# Altium PCB Mach dieu khien tu xa.PcbDoc
Units mm, origin at the board's own origin, x right, y up, seen from the top; angles counter-clockwise.
Board outline 143 x 70 mm, 2 copper layers (Top Layer, Bottom Layer); 72 components, 54 nets, 226 pads, 167 vias.
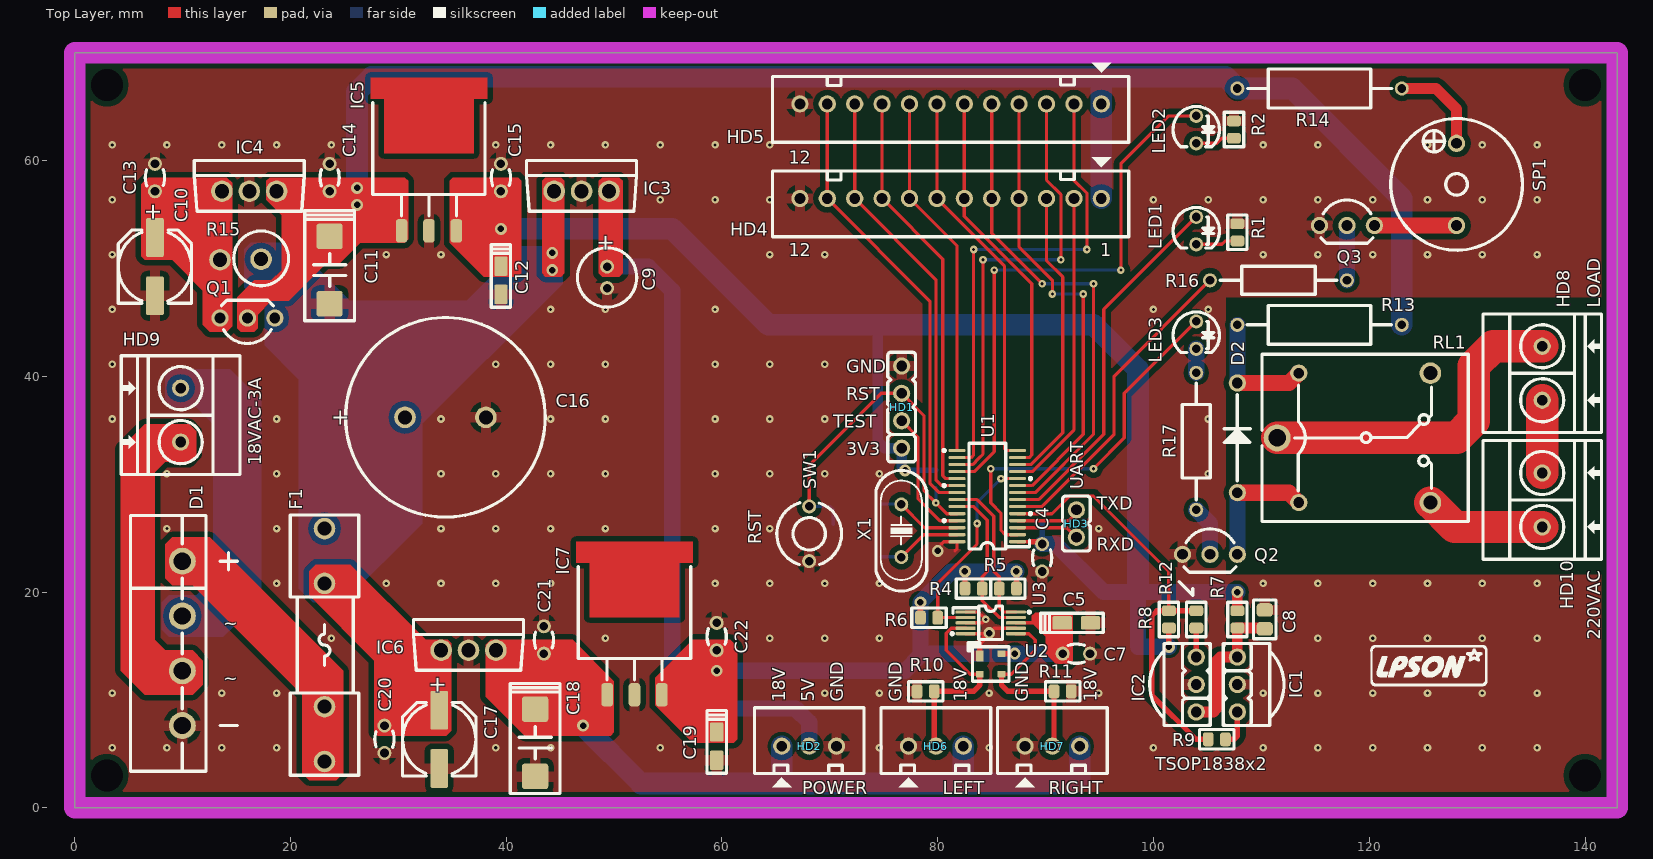
[diagram p0: Top Layer view]
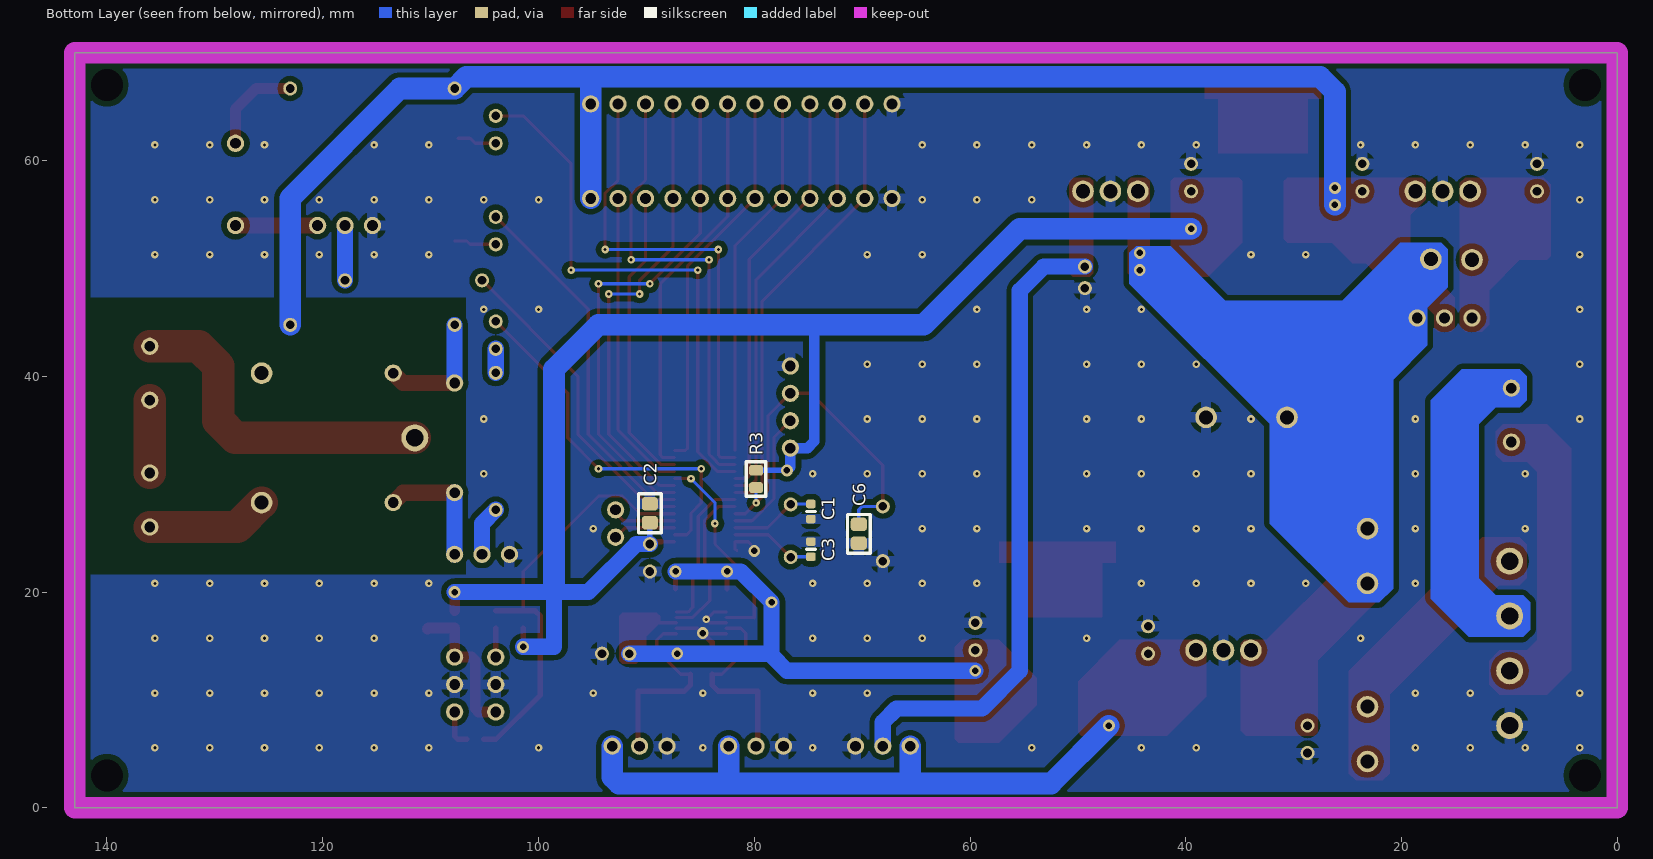
[diagram p1: Bottom Layer view, seen from below]

## Layer stack, top to bottom
Top Solder: solder mask 0.0102, Solder Resist, Dk 3.5
Top Layer: signal copper 0.0356
Dielectric1: dielectric 0.32, FR-4, Dk 4.8
Bottom Layer: signal copper 0.0356
Bottom Solder: solder mask 0.0102, Solder Resist, Dk 3.5

## Board outline
0,0 0,70 143,70 143,0

## Design rules (kind name [scope] priority, off if disabled: settings)
Clearance "Stitching GND" [IsStitchingVia and InNet('GND') vs (IsVia and (Not IsStitchingVia)) Or IsPad] p1: gap=0.5 ignorepadtopadclearanceinfootprint=FALSE
Clearance [All] p2: gap=0.5 ignorepadtopadclearanceinfootprint=FALSE
PlaneConnect [All] p1: planeconnectstyle=Relief reliefexpansion=0.5 reliefentries=4 reliefconductorwidth=0.5 reliefairgap=0.5
PolygonConnect PolygonConnect_1 [isvia] p1: connectstyle=Direct reliefconductorwidth=0.254 reliefentries=4 polygonreliefangle="90 Angle" airgapwidth=0.254
PolygonConnect [All] p2: connectstyle=Relief reliefconductorwidth=1 reliefentries=4 polygonreliefangle="90 Angle" airgapwidth=0.5
RoutingVias [All] p1: holewidth=0.3 width=0.7 viastyle="Through Hole" minholewidth=0.3 minwidth=0.7 maxholewidth=0.6 maxwidth=1.1
SolderMaskExpansion [All] p1: expansion=0.102 istentingtop=FALSE
Width [All] p1: maxlimit=3 minlimit=0.3 preferedwidth=0.5
29 further rules are at their usual default settings.

## Components (designator, comment, footprint, x,y, rotation, side; value= is the part's Value field where it differs from the comment)
C1 "22pF" C0603 74.755,27.464 r90 bottom
C2 "10uF/16V" C0805 89.677,27.305 r90 bottom
C3 "22pF" C0603 74.755,23.971 r270 bottom
C4 "100nF/16V" "Tu gom 104" 89.677,23.178 r90 top
C5 "10uF/16V" CAP_TANTA_10UF_16V 92.852,17.145 r0 top
C6 "1nF" C0805 70.31,25.4 r90 bottom
C7 "100nF/16V" "Tu gom 104" 92.852,14.287 r180 top
C8 "Cap Pol1" C0805 110.315,17.462 r90 top
C9 "10uF/16V" CAP_10UF_16V 49.355,50.165 r270 top
C10 "10uF/50V" C_FC_10UF_50V 7.445,50.165 r270 top
C11 "10uF/35V" CAP_TANTA_10UF_35V 23.637,49.848 r270 top
C12 "10uF/16V" CAP_TANTA_10UF_16V 39.512,48.895 r270 top
C13 "100nF/50V" "Tu gom 104" 7.445,58.42 r270 top
C14 "100nF/25V" "Tu gom 104" 23.637,58.42 r270 top
C15 "100nF/16V" "Tu gom 104" 39.512,58.42 r270 top
C16 "3300uF/50V" CAP_3300UF_50V 30.622,36.195 r0 top
C17 "10uF/50V" C_FC_10UF_50V 33.797,6.35 r270 top
C18 "10uF/35V" CAP_TANTA_10UF_35V 42.687,6.032 r270 top
C19 "10uF/16V" CAP_TANTA_10UF_16V 59.515,5.715 r270 top
C20 "100nF/50V" "Tu gom 104" 28.717,6.35 r90 top
C21 "100nF/25V" "Tu gom 104" 43.498,15.557 r270 top
C22 "100nF/16V" "Tu gom 104" 59.515,15.875 r270 top
D1 "KBU1010" KBU1010G 9.985,15.24 r270 top
D2 "1N4007" 1N4007 107.775,34.29 r90 top
F1 "Fuse/2.5A" FUSE2_5A 23.165,15.085 r90 top
HD1 "SpyBiWire" Header_4 76.66,37.148 r90 top
HD2 "Power" CON3 68.087,5.715 r0 top
HD3 "UART" Header_2 92.852,26.353 r90 top
HD4 "Display Port 1" CON12 81.197,56.487 r180 top
HD5 "Display Port 2" CON12 81.197,65.25 r180 top
HD6 "UM-18 LEFT" CON3 79.835,5.715 r0 top
HD7 "UM-18 RIGHT" CON3 90.63,5.715 r0 top
HD8 "Domino" DOMINO2_GREEN 136.032,37.783 r90 top
HD9 "18VAC-3A" DOMINO2_GREEN 9.83,38.897 r270 top
HD10 "220VAC" DOMINO2_GREEN 136.032,26.035 r90 top
IC1 "TSOP1838" TSOP1838 107.775,11.43 r90 top
IC2 "TSOP1838" TSOP1838 103.965,11.43 r270 top
IC3 "LM7805" LM7805 46.99,57.15 r0 top
IC4 "LM7812" LM7805 16.192,57.15 r0 top
IC5 "LM1086 (3.3V)" LM1086 32.845,53.482 r270 top
IC6 "LM7818" LM7805 36.513,14.605 r0 top
IC7 "LM1086 (3.3V)" LM1086 51.895,10.477 r270 top
LED1 "RED" LED3R 103.965,54.769 r270 top
LED2 "GREEN" LED3R 103.965,64.135 r270 top
LED3 "LED" LED3R 103.965,45.085 r270 top
Q1 "KSA1013" KSA1013 16.017,45.403 r180 top
Q2 "2N2222" 2N2222 105.235,23.495 r0 top
Q3 "2N2222" 2N2222 117.935,53.975 r0 top
R1 "Res2" RESC2012(0805) 107.775,53.34 r270 top
R2 "Res2" RESC2012(0805) 107.457,62.865 r270 top
R3 "Res2" RESC2012(0805) 79.835,30.48 r90 bottom
R4 "Res2" RESC2012(0805) 83.327,20.32 r180 top
R5 "Res2" RESC2012(0805) 86.502,20.32 r0 top
R6 "Res2" RESC2012(0805) 79.2,17.621 r180 top
R7 "Res2" RESC2012(0805) 107.775,17.462 r90 top
R8 "Res2" RESC2012(0805) 101.425,17.462 r270 top
R9 "Res2" RESC2012(0805) 105.87,6.35 r180 top
R10 "Resistor 1/4W" RESC2012(0805) 78.882,10.795 r180 top
R11 "Resistor 1/4W" RESC2012(0805) 91.582,10.795 r0 top
R12 "Res2" RESC2012(0805) 103.965,17.462 r90 top
R13 "Res2" CFR1WS 115.395,44.768 r180 top
R14 "Res2" CFR1WS 115.395,66.675 r0 top
R15 "Res2" R2WD 13.477,50.8 r0 top
R16 "Res2" "RES 1/4W CFR25" 105.235,48.895 r0 top
R17 "Res2" "RES 1/4W CFR25" 103.965,27.623 r90 top
RL1 "Relay 10A/5V" RL_10A_5V 118.57,34.29 r0 top
SP1 "Speaker" SPEAKER 128.095,61.595 r270 top
SW1 "RESET" "BUTTON 2PIN TRON" 68.087,27.94 r270 top
U1 "MSP430G2553" MSP430G2253IPW28R 84.597,28.893 r90 top
U2 "ADS1115" ADS1115 84.915,17.145 r270 top
U3 "PRTR5V0U2X" PRTR5V0U2X 84.915,13.335 r270 top
X1 "12Mhz" CRYSTAL 76.625,25.682 r270 top

## Footprints (in the part's own frame and the unit in brackets; to place one, negate y for a bottom-side part, rotate by r counter-clockwise, add the part's x,y. Pads: shape width x height; smd on the part's side, far side on the other; paste and mask are expansions set on the pad)
1N4007 [mm] "DIODE_DIP"
  round 1.6 hole 1 mask+0.1: 1(-5.08,0) 2(5.08,0)
  silkscreen extent -4,-1.2 4,1.21, body extent -5.8,-1.25 5.8,1.25, height 2.75
2N2222 [mm] "TO-92 Bent Lead, Flat Index; 3 In-Line, Axial Leads; Body Dia. 4.5mm; Leads 0.51 x 0.48 mm (max)"
  round 1.6 hole 1 mask+0.1: 1(-2.54,0) 2(0,0)
  round 1.6 hole 1: 3(2.54,0)
  silkscreen extent -2.41,-1.65 2.41,2.37, body extent -2.79,-1.59 2.79,2.61, height 10
ADS1115 [mm] "MSOP-10, 16-Bit  Analog-to-Digital"
  rrect50% 0.3x1.85 smd mask+0.05: 1(-1,-2.325) 2(-0.5,-2.325) 3(0,-2.325) 4(0.5,-2.325) 5(1,-2.325) 6(1,2.325) 7(0.5,2.325) 8(0,2.325) 9(-0.5,2.325) 10(-1,2.325)
  silkscreen extent -1.55,-3.67 1.55,3.68, body extent -1.5,-2.45 1.5,2.45, height 1.15
"BUTTON 2PIN TRON" [mm] "PIN TO PIN 5.08, W=6MM"
  round 1.3 hole 0.8: 1(0,0) 2(5.08,0)
  silkscreen extent -0.33,-3 5.4,3
C0603 [mm] "Chip Capacitor, Body 1.6x0.8mm, 1608"
  rrect50% 0.8x0.9 smd: 1(-0.7,0) 2(0.7,0)
  silkscreen extent 0,-0.4 0,0.4, body extent -0.8,-0.4 0.8,0.4, height 0.6
C0805 [mm] "Chip Capacitor, 2-Leads, Body 2.0x1.3mm, IPC Medium Density"
  rrect50% 1.25x1.5 smd: 1(-0.875,0) 2(0.875,0)
  silkscreen extent -1.8,-1.05 1.8,1.05, body extent -1,-0.6 1,0.6, height 0.95
C_FC_10UF_50V [mm] "ALUMINUM CAPACITOR 6.8x6.8x5.5mm"
  rrect20% 3.6x1.65 smd mask+0.1: 1(-2.7,0) 2(2.7,0)
  silkscreen extent -3.4,-3.4 3.4,3.4, body extent -3.65,-3.3 3.65,3.3, height 7.7
CAP_10UF_16V [mm] "Capacitor, Electrolytic, Radial; Body 5 x 11 mm (Dia.xH typ); Pin Spacing 2 mm (typ)"
  round 1.3 hole 0.8: 1(0,0) 2(2,0)
  silkscreen extent -1.75,-2.75 3.75,2.75, body extent -1.53,-2.53 3.53,2.53, height 11.53
CAP_3300UF_50V [mm] "Capacitor, Electrolytic, Radial; Body 18 x 35.5 mm (Dia.xH typ); Pin Spacing 7.5 mm (typ)"
  round 2 hole 1.3: 1(0,0) 2(7.5,0)
  silkscreen extent -5.5,-9.25 13,9.25
CAP_TANTA_10UF_16V [mm] "CAP TANTALUM 10UF 16V 10% C1206(3216), Body 3.2x1.6mm"
  rrect20% 1.8x1.23 smd: 1(-1.31,0) 2(1.31,0)
  silkscreen extent -3.3,-0.9 2.5,0.9, body extent -1.6,-0.8 1.6,0.8, height 1
CAP_TANTA_10UF_35V [mm] "CAP TANTALUM 10UF 35V 10% C2917(7343), Body 7.3x4.3mm"
  rrect20% 2.37x2.43 smd: 1(-3.12,0) 2(3.12,0)
  silkscreen extent -5.5,-2.3 4.7,2.3, body extent -3.8,-2.3 3.8,2.3, height 3.1
CFR1WS [mm] "RESISTOR_1W"
  round 1.3 hole 0.8: 1(-7.62,0) 2(7.62,0)
  silkscreen extent -6.68,-1.8 6.7,1.8
CON3 [mm] "CON 3"
  round 1.6 hole 1 mask+0.1: 1(-2.54,0) 2(0,0) 3(2.54,0)
  silkscreen extent -5.08,-3.8 5.08,3.56, body extent -5,-2.29 5,3.41, height 7
CON12 [mm] "CON12"
  round 1.6 hole 1 mask+0.1: 1(-13.97,0) 2(-11.43,0) 3(-8.89,0) 4(-6.35,0) 5(-3.81,0) 6(-1.27,0) 7(1.27,0) 8(3.81,0) 9(6.35,0) 10(8.89,0) 11(11.43,0) 12(13.97,0)
  silkscreen extent -16.51,-3.8 16.51,3.56, body extent -16.3,-2.29 16.3,3.41, height 7
CRYSTAL [mm] "Quartz Crystal, Thru-Hole; 2 Leads; Body 11.35 x 4.65 x 13.46 mm (LxWxH max)"
  round 1.3 hole 0.8 mask+0.1: 1(-2.44,0) 2(2.44,0)
  silkscreen extent -5.59,-2.35 5.59,2.35, body extent -5.49,-2.25 5.49,2.25, height 3.6
DOMINO2_GREEN [mm] "10A PIN TO PIN 5mm 11mmx11mm"
  round 1.6 hole 1 mask+0.1: 1(0,0) 2(5,0)
  silkscreen extent -3,-5.5 8,5.5, body extent -3.14,-4.05 7.62,4.95, height 12.5
FUSE2_5A [mm] "Fuse 2.5A  250V"
  round 2 hole 1.3: 1(-10.795,0) 1(-5.715,0) 2(5.715,0) 2(10.795,0)
  silkscreen extent -12.06,-3.18 12.06,3.18, body extent -11.3,-3.09 11.4,3.1, height 9.6
Header_2 [mm] "Connector DIP, 2Pin_2.54mm"
  round 1.6 hole 1 mask+0.1: 1(-1.27,0) 2(1.27,0)
  silkscreen extent -2.54,-1.28 2.54,1.28, body extent -2.54,-1.27 2.54,1.27, height 10.1
Header_4 [mm] "Connector DIP, 4Pin_2.54mm"
  round 1.6 hole 1 mask+0.1: 1(-3.81,0) 2(-1.27,0) 3(1.27,0) 4(3.81,0)
  silkscreen extent -5.08,-1.28 5.08,1.28, body extent -5.08,-1.27 5.08,1.27, height 10.1
KBU1010G [mm] "KBP206 bridge diode 10A"
  round 2.5 hole 1.6 mask+0.1: 1(-7.62,0) 2(-2.54,0) 3(2.54,0) 4(7.62,0)
  silkscreen extent -11.85,-4.8 11.85,2.2, body extent -11.6,-4.75 11.6,2.2, height 18.65
KSA1013 [mm] "TO-92 Bent Lead, Flat Index; 3 In-Line, Axial Leads; Body Dia. 4.5mm; Leads 0.51 x 0.48 mm (max)"
  round 1.6 hole 1 mask+0.1: 1(-2.54,0) 2(0,0)
  round 1.6 hole 1: 3(2.54,0)
  silkscreen extent -2.41,-1.65 2.41,2.37, body extent -2.79,-1.59 2.79,2.61, height 10
LED3R [mm] "LED 3mm_RED"
  round 1.3 hole 0.8: 1(0,0) 2(2.54,0)
  silkscreen extent -0.88,-2.15 2.87,2.15, body extent -0.73,-2 2.94,2, height 4.6
LM1086 [mm] "TO-263 1.5A Low Dropout Positive Regulators"
  rrect50% 2.16x1.07 smd mask+0.1: 1(0,-2.54) 2(0,0) 3(0,2.54)
  Top Layer region: -14.17,-5.4 -14.17,5.4 -12.26,5.4 -12.26,4.165 -7.18,4.165 -7.18,-4.165 -12.26,-4.165 -12.26,-5.4
  silkscreen extent -11.88,-5.21 -1.4,5.21, body extent -14.52,-5 1.15,5, height 4.78
LM7805 [mm] "POWER IC 7805"
  round 2 hole 1.3: 1(-2.54,0) 2(0,0) 3(2.54,0)
  silkscreen extent -5.1,-1.85 5.1,2.85, body extent -5.56,-1.63 5.65,3.06, height 19.17
MSP430G2253IPW28R [mm] "TSSOP PW 28  PIN TO PIN 0.65"
  oval 0.3x1.6 smd mask+0.1: 1(-4.225,-2.8) 2(-3.575,-2.8) 3(-2.925,-2.8) 4(-2.275,-2.8) 5(-1.625,-2.8) 6(-0.975,-2.8) 7(-0.325,-2.8) 8(0.325,-2.8) 9(0.975,-2.8) 10(1.625,-2.8) 11(2.275,-2.8) 12(2.925,-2.8) 13(3.575,-2.8) 14(4.225,-2.8) 15(4.225,2.8) 16(3.575,2.8) 17(2.925,2.8) 18(2.275,2.8) 19(1.625,2.8) 20(0.975,2.8) 21(0.325,2.8) 22(-0.325,2.8) 23(-0.975,2.8) 24(-1.625,2.8) 25(-2.275,2.8) 26(-2.925,2.8) 27(-3.575,2.8) 28(-4.225,2.8)
  silkscreen extent -4.9,-4.1 4.9,4.1, body extent -4.9,-3.31 4.9,3.31, height 1.2
PRTR5V0U2X [mm] "SOT143B Ultra low capacitance double rail-to-rail ESD protection diode"
  rrect10% 1x0.7 smd mask+0.1: 1(-0.75,-1)
  rrect10% 0.6x0.7 smd mask+0.1: 2(0.95,-1) 3(0.95,1) 4(-0.95,1)
  silkscreen extent -2,-2.1 1.6,1.7
R2WD [mm] "R2W, 2 pin 3.81mm stand"
  round 2 hole 1.3: 1(0,0) 2(3.81,0.051)
  silkscreen extent 1.27,-2.41 6.35,2.66
"RES 1/4W CFR25" [mm] "Axial Device, Thru-Hole; 2 Leads fi 0.55"
  round 1.3 hole 0.8 mask+0.1: 1(0,0) 2(12.7,0)
  silkscreen extent 0.94,-1.3 11.76,1.3, body extent 0.97,-1.16 11.74,1.16, height 2.93
RESC2012(0805) [mm] "Chip Resistor, Body 2.0x1.3mm, 1/8W 0805"
  rrect50% 1x1.3 smd: 1(-0.8,0) 2(0.8,0)
  silkscreen extent -1.6,-0.9 1.6,0.9, body extent -1,-0.62 1,0.63, height 0.6
RL_10A_5V [mm] "Relay SRD-05VDC-SL-C, 5 pin, 10A,19.1X15.5"
  round 2.5 hole 1.6: 1(-7.1,0)
  round 2 hole 1.3: 2(7.1,6) 3(7.1,-6)
  round 1.6 hole 1: 4(-5.1,-6) 5(-5.1,6)
  silkscreen extent -8.5,-7.75 10.6,7.75, body extent -8.5,-7.75 10.6,7.75, height 15.3
SPEAKER [mm] "TMB12A05"
  round 1.6 hole 1 mask+0.1: 1(0,0) 2(7.62,0)
  silkscreen extent -2.29,-6.1 9.91,6.1
TSOP1838 [mm] "Connector DIP, 3Pin_2.54mm"
  round 1.6 hole 1 mask+0.1: 1(2.54,0) 2(0,0) 3(-2.54,0)
  silkscreen extent -3.81,-4.32 3.81,1.3
"Tu gom 104" [mm] "Capacitor, Radial, Tantalum, Non-Polarised; Body 3.05 x 1.78 x 3.43 mm (WxTxH max); Pin Spacing 2.54 mm (typ)"
  round 1.3 hole 0.8: 1(-1.27,0) 2(1.27,0)
  silkscreen extent -0.73,-0.89 0.76,0.89, body extent -2.92,-0.85 2.92,0.85, height 6.42

## Part data
C1 C3: library part CN1, "0805-SMD Capacitor"
C2 C16: library part CP1, "Cap P  0,1uF < 22uF , 16 - 50V"
C4 C6 C7 C13 C14 C15 C20 C21 C22: library part CN2, "Cap np 104 => 105pF"
C5 C11 C12 C18 C19: library part CP1, "Tantalum Capacitor"
C8: "Polarized Capacitor (Radial)"
C9 C10 C17: library part CP1, "Aluminium Capacitor"
D1: "10A glass passivated bridge rectifier"
D2: library part D1A, "Diode 1A"
F1: library part Fuse, "Fuse"
HD1: library part Hed4, "Header 4 (Green)"
HD2 HD6 HD7: library part Hed3, "Header 3 (Green)"
HD3 HD8 HD9 HD10: library part Hed2, "Header 2 (Green)"
HD4 HD5: library part Hed12, "Header 12"
IC3 IC4 IC5 IC6 IC7: library part LM78xx, "Linear Regulator"
LED1 LED2: library part LED, "LED Single colour Green and Red"
LED3: "LED Single colour Green and Red"
Q1: library part A1015, "PNP 600mW, ECB"
Q2 Q3: library part C1815, "TRANS GP SS NPN LP 40V TO92"
R1 R2 R3 R4 R5 R6 R7 R8 R9 R12 R13 R14 R15 R16 R17: "Resistor"
R10 R11: library part Res2
RL1: library part "Relay 1", "Relay SPDT,10A - 12VDC 5 Pin"
SP1: library part SPK, "Speaker Chip"
SW1: library part SW2, "Switch button 2 pin"
U1: "MSP430G2553 (28 pins)"
U2: "Analog to Digital Converter"
U3: "ESD protection diode"
X1: library part XT2, "Crystal For all Crystal 2pin."

## Free pads (board coordinates)
  round 0 hole 3 mask+2.5: hole1(140,3) hole2(140,67) hole3(3,67) hole4(3,3)

## Via types
v1: diameter 0.7, hole 0.3, Top Layer to Bottom Layer, tented both sides, 151 vias
v2: diameter 1.1, hole 0.6, Top Layer to Bottom Layer, 16 vias

## Nets (pads, with @x,y where several pads share a name; then routed paths per layer and width w, separated by ;. In a path a pad name is that pad's centre, name@x,y a point inside that pad or via, vN(x,y) a via of type N, cw(c..) or ccw(c..) an arc to the next point about the centre after c; other vN are vias at no path point)
3.3VA: C5.1 C7.2 C19.1 C22.2 IC7.3 R4.2 R5.2 R6.2 U2.8 U3.4 | length 57
  Top Layer w0.3: U2.8 C5.1@90.953,17.145
  Top Layer w0.5: R6.2 v2(78.4,19.05) ; R4.2 v2(82.527,21.907) ; U3.4 v2@87.135,14.285 ; R5.2 v2(87.303,21.907)
  Bottom Layer w1.5: v2(59.515,12.7) 76.977,12.7 78.4,14.122 v2(78.4,19.05) 81.257,21.907 v2(82.527,21.907) v2(87.303,21.907) ; 78.565,14.287 v2(87.137,14.287) C7.2
3V3: C2.1 C4.2 C12.1 C15.2 HD1.1 IC5.3 R3.2 R7.2 R8.2 U1.1 | length 139.1
  Top Layer w0.3: U1.1 88.627,24.667
  Top Layer w0.5: 88.627,24.667 89.457,24.667 C4.2 ; v2(101.425,14.922) R8.2
  Top Layer w1: R7.2 v2(107.775,20.002)
  Bottom Layer w0.5: v2(76.977,31.28) R3.2 ; C4.2 C2.1
  Bottom Layer w1: 74.437,44.768 74.437,33.973 75.072,33.338 HD1.1 76.66,31.598 v2(76.977,31.28)
  Bottom Layer w1.5: C4.2 90.947,24.448 90.947,24.436 95.381,20.002 98.567,20.002 ; v2(101.425,14.922) 98.567,14.922 98.567,20.002 ; v2(107.775,20.002) 98.567,20.002
  Bottom Layer w2: v2(39.512,53.657) 55.387,53.657 64.277,44.768 74.437,44.768 94.44,44.768 98.567,40.64 98.567,20.002
5V: C9.1 HD2.2 IC3.3 | length 59.1
  Bottom Layer w1.5: C9.1 53.165,50.165 55.387,47.943 55.387,12.7 58.88,9.207 66.817,9.207 68.087,7.938 HD2.2
12V: C11.1 C14.2 HD4.1 HD5.1 IC4.3 IC5.1 Q1.2 R13.1 R14.1 | length 135.5
  Bottom Layer w2: v2(26.177,55.88) 26.177,66.358 27.566,67.746 95.167,67.746 ; HD4.1 HD5.1 95.167,67.746 ; R13.1 123.015,56.515 112.855,66.675 R14.1 106.704,67.746 95.167,67.746
  other v2: 26.177,57.468
18V: C18.1 C21.2 HD2.1 HD6.3 HD7.3 IC6.3 IC7.1 | length 58.3
  Bottom Layer w2: v2(47.132,7.62) 52.498,2.254 65.547,2.254 ; HD2.1 65.547,2.254 ; HD6.3 82.375,2.254 ; HD7.3 93.17,2.857 92.567,2.254 82.375,2.254 ; 65.547,2.254 82.375,2.254
26VDC: C16.1 C17.1 C20.2 F1.2 IC3.1 IC6.1 Q1.1 R15.2
  other v2: 44.275,49.848 44.275,51.435
AIN0: HD6.2 R10.1 U2.4 U3.2 | length 18.2
  Top Layer w0.3: U2.4 81.24,16.645 80.787,16.192 80.787,14.605 83.007,12.385 U3.2
  Top Layer w0.5: HD6.2 79.682,5.868 R10.1 83.327,10.795 83.915,11.382 U3.2
AIN2: HD7.2 R11.1 U2.6 U3.3 | length 18.3
  Top Layer w0.3: U3.3 86.822,12.385 89.042,14.605 89.042,15.557 88.455,16.145 U2.6
  Top Layer w0.5: U3.3 85.915,11.382 86.502,10.795 R11.1 90.783,5.868 HD7.2
ALERT: R6.1 U1.10 U2.2 | length 19.5
  Top Layer w0.3: U2.2 80.024,17.645 R6.1 80,20.802 83.645,24.448 v1(83.645,26.353) ; v1(85.867,30.518) U1.10
  Bottom Layer w0.3: v1(83.645,26.353) 83.645,28.295 v1(85.867,30.518)
BUZZ: R16.1 U1.6 | length 29.7
  Top Layer w0.3: U1.6 89.655,27.918 96.345,34.608 96.345,40.005 R16.1
GND: C1.1 C2.2 C3.1 C4.1 C5.2 C6.1 C7.1 C8.2 C9.2 C10.2 C11.2 C12.2 C13.1 C14.1 C15.1 C16.2 C17.2 C18.2 C19.2 C20.1 C21.1 C22.1 D1.4 HD1.4 HD2.3 HD4.12 HD5.12 HD6.1 HD7.1 IC1.2 IC2.2 IC3.2 IC4.2 IC5.2 IC6.2 IC7.2 Q2.1 Q3.1 R1.1 R2.1 R10.2 R11.2 SW1.2 U1.28 U2.1 U2.3 U2.5 U2.7 U3.1 | length 13.9
  Top Layer w0.3: 80.328,24.448 80.547,24.667 U1.28 81.797,24.012 81.597,23.813 ; U2.5 84.725,16.145 v2(84.772,16.192) 85.225,16.645 U2.7 ; U2.3 84.138,17.145 v1(84.455,17.462) 83.772,18.145 U2.1
  Top Layer w0.5: U3.1 83.915,15.335 v2@84.725,16.145
  other v1: 3.48,5.56 8.56,5.56 13.64,5.56 18.72,5.56 39.04,5.56 44.12,5.56 54.28,5.56 74.6,5.56 84.76,5.56 100,5.56 110.16,5.56 115.24,5.56 120.32,5.56 125.4,5.56 130.48,5.56 135.56,5.56 3.48,10.64 13.64,10.64 18.72,10.64 69.52,10.64 74.6,10.64 84.76,10.64 94.92,10.64 110.16,10.64 115.24,10.64 120.32,10.64 125.4,10.64 130.48,10.64 135.56,10.64 23.8,15.72 49.2,15.72 64.44,15.72 69.52,15.72 74.6,15.72 115.24,15.72 120.32,15.72 125.4,15.72 130.48,15.72 135.56,15.72 18.72,20.8 28.88,20.8 33.96,20.8 39.04,20.8 44.12,20.8 59.36,20.8 64.44,20.8 69.52,20.8 74.6,20.8 110.16,20.8 115.24,20.8 120.32,20.8 125.4,20.8 130.48,20.8 135.56,20.8 8.56,25.88 18.72,25.88 33.96,25.88 39.04,25.88 44.12,25.88 49.2,25.88 59.36,25.88 64.44,25.88 94.92,25.88 8.56,30.96 18.72,30.96 33.96,30.96 39.04,30.96 44.12,30.96 49.2,30.96 59.36,30.96 64.44,30.96 69.52,30.96 74.6,30.96 105.08,30.96 3.48,36.04 18.72,36.04 33.96,36.04 44.12,36.04 49.2,36.04 59.36,36.04 64.44,36.04 69.52,36.04 105.08,36.04 3.48,41.12 39.04,41.12 44.12,41.12 49.2,41.12 59.36,41.12 64.44,41.12 69.52,41.12 3.48,46.2 44.12,46.2 49.2,46.2 59.36,46.2 100,46.2 105.08,46.2 3.48,51.28 28.88,51.28 33.96,51.28 64.44,51.28 69.52,51.28 110.16,51.28 115.24,51.28 120.32,51.28 125.4,51.28 130.48,51.28 135.56,51.28 3.48,56.36 54.28,56.36 59.36,56.36 64.44,56.36 100,56.36 105.08,56.36 110.16,56.36 115.24,56.36 120.32,56.36 125.4,56.36 130.48,56.36 135.56,56.36 3.48,61.44 8.56,61.44 13.64,61.44 18.72,61.44 23.8,61.44 39.04,61.44 44.12,61.44 49.2,61.44 54.28,61.44 59.36,61.44 64.44,61.44 110.16,61.44 115.24,61.44 125.4,61.44 130.48,61.44 135.56,61.44
  other v2: 80.01,23.813
IREMOTE: R8.1 R9.2 R12.2 U1.5 | length 39.8
  Top Layer w0.3: U1.5 90.592,27.267 92.217,28.893 94.44,28.893 101.425,21.907 R8.1
  Top Layer w0.5: R12.2 R8.1 100.32,18.262 99.837,17.78 99.837,10.477 103.965,6.35 R9.2
LEDA1: HD4.2 U1.11 | length 28.3
  Top Layer w0.3: U1.11 88.777,31.167 92.627,35.017 HD4.2
LEDA2: HD4.3 U1.12 | length 27.8
  Top Layer w0.3: U1.12 88.644,31.818 91.582,34.756 91.582,49.213 90.087,50.708 HD4.3
LEDB1: HD5.2 U1.16 | length 45.2
  Top Layer w0.3: U1.16 83.092,32.467 83.327,32.703 v1(83.327,51.753) ; HD5.2 92.627,58.19 93.831,56.986 v1(93.831,51.753)
  Bottom Layer w0.3: v1(83.327,51.753) v1(93.831,51.753)
LEDB2: HD5.3 U1.17 | length 43
  Top Layer w0.3: U1.17 83.235,31.818 83.802,32.385 83.802,32.394 84.199,32.791 v1(84.199,50.8) ; HD5.3 90.087,58.19 91.422,56.854 v1(91.422,50.8)
  Bottom Layer w0.3: v1(84.199,50.8) v1(91.422,50.8)
NetC8_1: C8.1 IC1.1 IC2.1 R7.1 | length 13.8
  Top Layer w1: IC2.1 105.552,8.89 105.87,9.207 105.87,13.652 106.187,13.97 IC1.1 R7.1 110.24,16.663 C8.1
NetC10_1: C10.1 C13.2 IC4.1 Q1.3 R15.1
NetD1_1: D1.1 F1.1
NetD1_2: D1.2 HD9.1
NetD1_3: D1.3 HD9.2
NetD2_1: D2.1 Q2.3 RL1.4 | length 11.8
  Top Layer w1.5: D2.1 112.55,29.21 RL1.4
  Bottom Layer w1.5: Q2.3 D2.1
NetD2_2: D2.2 R13.2 RL1.5 | length 11.5
  Top Layer w1.5: D2.2 112.55,39.37 RL1.5
  Bottom Layer w1.5: D2.2 R13.2
NetHD8_1: HD8.1 HD10.2 | length 6.7
  Top Layer w3: HD10.2 HD8.1
NetHD8_2: HD8.2 RL1.1 | length 31.1
  Top Layer w3: RL1.1 128.095,34.29 129.682,35.878 129.682,40.958 131.507,42.783 HD8.2
NetHD10_1: HD10.1 RL1.3 | length 11.3
  Top Layer w3: RL1.3 127.925,26.035 HD10.1
NetIC1_3: IC1.3 R9.1 | length 3.5
  Top Layer w0.5: R9.1 107.457,6.35 107.775,6.667 IC1.3
NetIC2_3: IC2.3 R12.1 | length 2.7
  Top Layer w0.5: IC2.3 R12.1
NetLED1_2: LED1.2 R1.2 | length 3.9
  Top Layer w0.3: LED1.2 106.346,52.229 106.657,52.54 R1.2
NetLED2_2: LED2.2 R2.2 | length 3.7
  Top Layer w0.3: LED2.2 105.87,61.595 106.34,62.065 R2.2
NetLED3_2: LED3.2 R17.2 | length 2.2
  Bottom Layer w1.5: R17.2 LED3.2
NetQ2_2: Q2.2 R17.1 | length 4.7
  Bottom Layer w1.5: R17.1 105.235,26.353 Q2.2
NetQ3_2: Q3.2 R16.2 | length 5.1
  Bottom Layer w1.5: R16.2 Q3.2
NetQ3_3: Q3.3 SP1.2 | length 7.6
  Top Layer w1.5: Q3.3 SP1.2
NetR4_1: R4.1 U1.23 U2.9 | length 14.7
  Top Layer w0.3: U1.23 83.35,27.918 84.597,26.67 84.597,21.907 84.127,21.437 R4.1 84.127,19.203 85.685,17.645 U2.9
NetR5_1: R5.1 U1.22 U2.10 | length 14.4
  Top Layer w0.3: U1.22 83.652,28.567 85.197,27.023 85.197,21.943 85.703,21.437 R5.1 85.703,18.58 86.137,18.145 U2.10
NetR14_2: R14.2 SP1.1 | length 9
  Top Layer w1: R14.2 126.19,66.675 128.095,64.77 SP1.1
P1.5: LED1.1 U1.7 | length 34.2
  Top Layer w0.3: U1.7 89.352,28.567 95.392,34.608 95.392,46.196 LED1.1
P2.5: LED2.1 U1.18 | length 51.4
  Top Layer w0.3: U1.18 83.38,31.167 85.232,33.02 v1(85.232,49.848) ; v1(96.98,49.848) 96.98,59.69 101.425,64.135 LED2.1
  Bottom Layer w0.3: v1(85.232,49.848) v1(96.98,49.848)
RELAY: LED3.1 U1.2 | length 34.9
  Top Layer w0.3: v1(84.915,31.433) 84.915,28.258 85.867,27.305 85.867,25.718 86.267,25.318 U1.2 ; v1(94.44,31.433) 97.297,34.29 97.297,38.418 LED3.1
  Bottom Layer w0.3: v1(84.915,31.433) v1(94.44,31.433)
RESET: C6.2 HD1.3 R3.1 SW1.1 U1.24 | length 34.1
  Top Layer w0.3: SW1.1 68.087,31.75 74.755,38.418 HD1.3 78.727,36.35 78.727,29.365 v1(79.835,28.258) 80.825,27.267 U1.24
  Bottom Layer w0.3: SW1.1 69.992,27.94 70.31,27.623 C6.2 ; v1(79.835,28.258) R3.1
RXD: HD3.1 U1.3 | length 5.8
  Top Layer w0.3: U1.3 91.967,25.967 HD3.1
SEG_A: HD4.4 HD5.4 U1.9 | length 42.8
  Top Layer w0.3: U1.9 88.747,29.867 93.487,34.608 v1(93.487,47.625) ; HD5.4 HD4.4 87.547,51.978 90.63,48.895 v1(90.63,47.625)
  Bottom Layer w0.3: v1(90.63,47.625) v1(93.487,47.625)
SEG_B: HD4.5 HD5.5 U1.8 | length 46.6
  Top Layer w0.3: HD5.5 HD4.5 85.007,53.248 v1(89.677,48.578) ; U1.8 89.05,29.218 94.44,34.608 v1(94.44,48.578)
  Bottom Layer w0.3: v1(89.677,48.578) v1(94.44,48.578)
SEG_C: HD4.6 HD5.6 U1.13 | length 36.6
  Top Layer w0.3: HD5.6 HD4.6 82.467,54.836 88.725,48.578 88.725,32.703 88.49,32.467 U1.13
SEG_D: HD4.7 HD5.7 U1.14 | length 35.8
  Top Layer w0.3: HD5.7 HD4.7 86.185,50.229 86.185,33.338 86.405,33.118 U1.14
SEG_E: HD4.8 HD5.8 U1.15 | length 34
  Top Layer w0.3: HD5.8 HD4.8 81.797,52.076 U1.15
SEG_F: HD4.9 HD5.9 U1.19 | length 38.2
  Top Layer w0.3: HD5.9 HD4.9 80.47,50.864 80.47,30.798 80.75,30.518 U1.19
SEG_G: HD4.10 HD5.10 U1.20 | length 40.2
  Top Layer w0.3: HD5.10 HD4.10 79.835,48.959 79.835,30.399 80.366,29.867 U1.20
SEG_H: HD4.11 HD5.11 U1.21 | length 42
  Top Layer w0.3: HD5.11 HD4.11 79.281,46.972 79.281,30.081 80.145,29.218 U1.21
TEST: HD1.2 U1.25 | length 12.3
  Top Layer w0.3: HD1.2 78.173,34.364 78.173,28.649 80.205,26.618 U1.25
TXD: HD3.2 U1.4 | length 6.1
  Top Layer w0.3: U1.4 92.165,26.618 92.852,27.305 HD3.2
XIN: C3.2 U1.27 X1.2 | length 7.9
  Top Layer w0.3: X1.2 78.7,25.318 U1.27
  Bottom Layer w0.3: C3.2 76.595,23.271 X1.2
XOUT: C1.2 U1.26 X1.1 | length 8
  Top Layer w0.3: X1.1 78.779,25.967 U1.26
  Bottom Layer w0.3: C1.2 76.583,28.164 X1.1
pads on no net: RL1.2

## Polygon pours and split planes (outlines as drawn)
GND on Top Layer "Bottom Layer-No Net" (solid, remove dead copper, pour order 4): 0,70 0,0 143,0 142.558,0 142.558,70 0,70
GND on Bottom Layer "Bottom Layer-No Net" (solid, remove dead copper, pour order 6): 0,70 0,0 143,0 143,70 0,70

## Keep-outs
Keep-Out Layer:
  the board outline again, w2

## Other copper
Top Layer:
  region net 3.3VA: 88.725,17.78 89.042,18.098 92.217,18.098 92.535,17.78 92.535,13.652 92.217,13.335 90.947,13.335 89.995,14.287 89.995,15.875 88.725,17.145
  region net 5V: 48.578,58.102 48.895,58.42 50.483,58.42 50.8,58.102 50.8,49.53 50.483,49.213 48.895,49.213 48.578,49.53
  region net 3V3: 34.75,52.387 37.925,49.213 41.1,49.213 41.417,49.53 41.417,58.102 41.1,58.42 35.067,58.42 34.75,58.102
  region net 12V: 15.065,44.45 15.382,44.133 16.652,44.133 16.97,44.45 16.97,45.72 18.24,46.99 19.827,46.99 23.32,50.483 24.59,50.483 24.59,54.927 19.192,54.927 19.192,49.848 18.24,48.895 16.652,48.895 15.065,47.308
  region net 12V: 23.002,50.483 24.59,50.483 26.495,52.387 30.622,52.387 30.94,52.705 30.94,58.102 30.622,58.42 18.098,58.42 17.78,58.102 17.78,56.34 22.685,51.435 22.685,50.8
  region net NetC10_1: 12.525,44.133 14.112,44.133 14.605,44.625 14.605,57.927 14.112,58.42 6.81,58.42 6.175,57.785 6.175,51.118 6.492,50.8 9.032,50.8 11.89,47.943 11.89,44.768
  region net 3.3VA: 53.8,12.065 57.292,15.557 60.785,15.557 61.42,14.922 61.42,6.35 61.102,6.032 57.292,6.032 53.8,9.525
  region net 18V: 38.1,15.098 38.56,15.557 46.18,15.557 49.99,11.747 49.99,6.985 49.672,6.667 41.735,6.667 38.1,10.302
  region net 26VDC: 25.542,22.543 32.527,15.557 34.608,15.557 34.925,15.24 34.925,7.16 34.432,6.667 28.082,6.667 27.765,6.985 27.765,13.652 21.732,19.685 21.732,21.907 22.367,22.543
  region net NetD1_1: 8.397,24.448 8.397,21.273 9.032,20.637 10.937,20.637 21.097,10.477 21.097,3.175 21.732,2.54 24.272,2.54 24.907,3.175 24.907,12.7 12.525,25.083 9.032,25.083
  region net NetD1_3: 11.255,32.703 11.255,34.925 10.62,35.56 6.492,35.56 4.27,33.338 4.27,12.7 6.492,10.477 10.937,10.477 11.89,11.43 11.89,13.652 10.937,14.605 8.397,14.605 7.445,15.557 7.445,31.115 8.397,32.068 10.62,32.068
  region net 26VDC: 43.322,58.102 43.64,58.42 45.085,58.42 45.403,58.102 45.403,49.53 45.085,49.213 43.64,49.213 43.322,49.53
Bottom Layer:
  region net 26VDC: 24.907,19.05 32.21,26.353 32.21,40.323 20.145,52.387 16.335,52.387 15.7,51.753 15.7,48.26 17.605,46.355 17.605,42.863 20.78,39.688 20.78,20.32 22.05,19.05
  region net NetD1_2: 8.397,37.783 8.397,40.005 9.032,40.64 14.43,40.64 17.287,37.783 17.287,19.367 13.795,15.875 8.715,15.875 8.08,16.51 8.08,19.05 8.715,19.685 11.255,19.685 12.842,21.273 12.842,35.56 11.255,37.148 9.032,37.148
  region net 26VDC: 45.227,51.435 44.592,52.07 41.417,52.07 36.337,46.99 25.225,46.99 25.225,34.608 31.257,34.608 45.227,48.578

## Silkscreen, mask and mechanical layers (free items; w line width, h text height)
Top Overlay:
  drawing of 897 lines, arcs and shapes, not listed
  text "12" at 66.182,59.69 h1.2
  text "12" at 66.182,51.118 h1.2
  text "1" at 95.075,51.118 h1.2
  text "LOAD" at 141.43,46.355 h1.2 r90
  text "GND" at 71.51,40.323 h1.2
  text "RST" at 71.51,37.783 h1.2
  text "TEST" at 70.31,35.243 h1.2
  text "3V3" at 71.51,32.703 h1.2
  text "18VAC-3A" at 17.287,31.75 h1.2 r90
  text "UART" at 93.487,29.528 h1.2 r90
  text "TXD" at 94.757,27.623 h1.2
  text "RST" at 63.642,24.448 h1.2 r90
  text "RXD" at 94.757,23.813 h1.2
  text "~" at 13.795,16.51 h1.2
  text "220VAC" at 141.43,15.557 h1.2 r90
  text "~" at 13.795,11.43 h1.2
  text "18V" at 65.865,9.842 h1.2 r90
  text "5V" at 68.564,9.842 h1.2 r90
  text "GND" at 71.262,9.842 h1.2 r90
  text "GND" at 76.66,9.842 h1.2 r90
  text "18V" at 82.692,9.842 h1.2 r90
  text "GND" at 88.407,9.842 h1.2 r90
  text "18V" at 94.757,9.842 h1.2 r90
  text "TSOP1838x2" at 100.155,3.492 h1.2
  text "POWER" at 67.452,1.27 h1.2
  text "LEFT" at 80.47,1.27 h1.2
  text "RIGHT" at 90.312,1.27 h1.2

## Dimensions
0,0 to 143,0 on Mechanical 10
0,0 to 0,70 on Mechanical 10

## Text inside footprints (layer, text, board x,y; h text height)
C9: Top Overlay "+" at 48.593,53.229 h1.5 r270; Mechanical 1 "+" at 48.855,51.665 h1 r270; Mechanical 1 "1" at 48.855,50.365 h1 r270; Mechanical 1 "2" at 48.855,48.465 h1 r270
C10: Top Overlay "+" at 6.645,56.065 h1.5 r270; Mechanical 1 "+" at 6.445,53.365 h2 r270
C16: Top Overlay "+" at 23.773,35.495 h1.5; Mechanical 1 "2" at 37.822,35.595 h1.2; Mechanical 1 "1" at 30.422,35.595 h1.2; Mechanical 1 "+" at 26.872,35.495 h1.5
C17: Top Overlay "+" at 32.997,12.25 h1.5 r270; Mechanical 1 "+" at 32.797,9.55 h2 r270
D1: Mechanical 1 "1" at 9.485,22.96 h1 r270; Mechanical 1 "4" at 9.485,7.96 h1 r270; Mechanical 1 "-" at 7.585,7.76 h1 r270; Mechanical 1 "AC" at 7.485,13.46 h1 r270; Mechanical 1 "AC" at 7.485,18.56 h1 r270; Mechanical 1 "+" at 7.585,23.16 h1 r270
HD1: Mechanical 1 "4" at 76.914,40.704 h1.2 r90; Mechanical 1 "1" at 76.914,33.084 h1.2 r90
HD2: Mechanical 1 "3" at 70.287,5.215 h1; Mechanical 1 "1" at 65.387,5.215 h1
HD3: Mechanical 1 "1" at 93.106,24.829 h1.2 r90; Mechanical 1 "2" at 93.106,27.369 h1.2 r90
HD4: Mechanical 1 "1" at 95.296,56.987 h1 r180; Mechanical 1 "12" at 67.997,56.987 h1 r180
HD5: Mechanical 1 "1" at 95.296,65.75 h1 r180; Mechanical 1 "12" at 67.997,65.75 h1 r180
HD6: Mechanical 1 "3" at 82.035,5.215 h1; Mechanical 1 "1" at 77.135,5.215 h1
HD7: Mechanical 1 "3" at 92.83,5.215 h1; Mechanical 1 "1" at 87.93,5.215 h1
IC1: Mechanical 1 "GND" at 111.975,11.93 h1 r180; Mechanical 1 "VCC" at 110.475,12.33 h1 r90; Mechanical 1 "OUT" at 110.475,7.93 h1 r90; Mechanical 1 "3" at 108.029,8.636 h1.2 r90; Mechanical 1 "1" at 108.029,13.716 h1.2 r90
IC2: Mechanical 1 "GND" at 99.765,10.93 h1; Mechanical 1 "VCC" at 101.265,10.53 h1 r270; Mechanical 1 "OUT" at 101.265,14.93 h1 r270; Mechanical 1 "3" at 103.711,14.224 h1.2 r270; Mechanical 1 "1" at 103.711,9.144 h1.2 r270
IC3: Mechanical 1 "O" at 49.149,58.674 h1.2; Mechanical 1 "G" at 46.609,58.674 h1.2; Mechanical 1 "I" at 44.323,58.674 h1.2
IC4: Mechanical 1 "O" at 18.351,58.674 h1.2; Mechanical 1 "G" at 15.811,58.674 h1.2; Mechanical 1 "I" at 13.525,58.674 h1.2
IC5: Mechanical 1 "1" at 30.145,57.157 h1; Mechanical 1 "2" at 32.445,57.157 h1; Mechanical 1 "3" at 35.045,57.057 h1
IC6: Mechanical 1 "O" at 38.672,16.129 h1.2; Mechanical 1 "G" at 36.132,16.129 h1.2; Mechanical 1 "I" at 33.846,16.129 h1.2
IC7: Mechanical 1 "1" at 49.195,14.152 h1; Mechanical 1 "2" at 51.495,14.152 h1; Mechanical 1 "3" at 54.095,14.052 h1
Q1: Mechanical 1 "E" at 18.811,45.784 h0.8 r180; Mechanical 1 "C" at 16.271,45.784 h0.8 r180; Mechanical 1 "B" at 13.731,45.784 h0.8 r180
Q2: Mechanical 1 "C" at 107.635,23.095 h0.8; Mechanical 1 "E" at 102.435,23.095 h0.8; Mechanical 1 "B" at 105.035,23.095 h0.8
Q3: Mechanical 1 "C" at 120.335,53.575 h0.8; Mechanical 1 "E" at 115.135,53.575 h0.8; Mechanical 1 "B" at 117.735,53.575 h0.8
RL1: Mechanical 1 "3" at 125.27,27.59 h1.2; Mechanical 1 "2" at 125.27,39.69 h1.2; Mechanical 1 "4" at 113.07,27.69 h1.2; Mechanical 1 "5" at 113.17,39.79 h1.2; Mechanical 1 "1" at 111.27,33.69 h1.2
SP1: Mechanical 1 "1" at 127.595,61.795 h1.2 r270; Mechanical 1 "2" at 127.495,54.275 h1.2 r270
U1: Mechanical 1 "28" at 83.697,24.392 h1 r90; Mechanical 1 "15" at 83.697,31.892 h1 r90; Mechanical 1 "14" at 86.497,31.992 h1 r90
U2: Mechanical 1 "5" at 83.515,16.345 h0.8 r270; Mechanical 1 "6" at 85.515,16.345 h0.8 r270; Mechanical 1 "10" at 85.515,18.545 h0.8 r270
U3: Mechanical 1 "GND" at 84.215,14.835 h0.5 r270; Mechanical 1 "IO1" at 84.255,12.975 h0.5 r270; Mechanical 1 "IO2" at 85.065,13.085 h0.5 r270; Mechanical 1 "VCC" at 85.055,14.785 h0.5 r270